# EAGLE board Board (EAGLE 9.5.1)
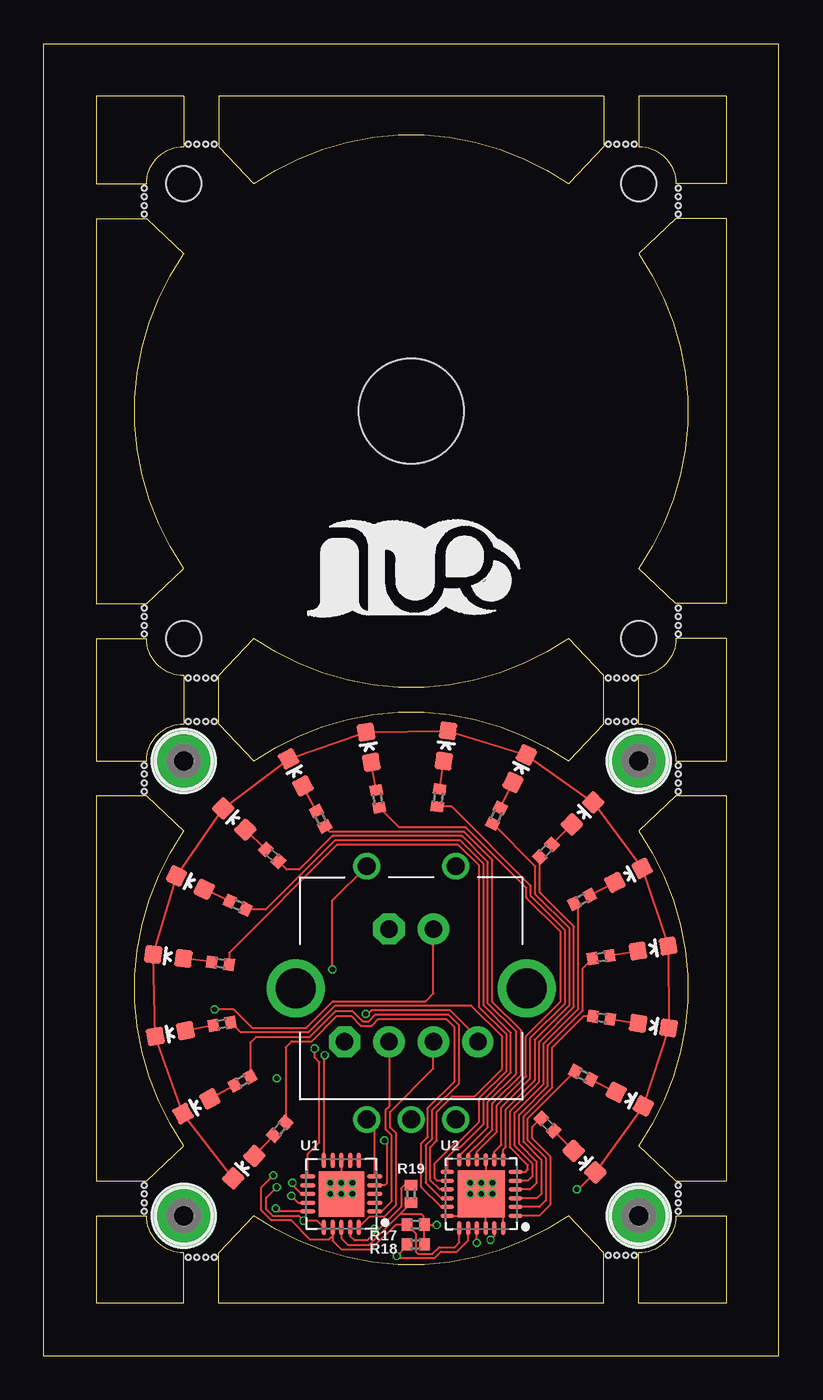
[diagram p0: board, top side]
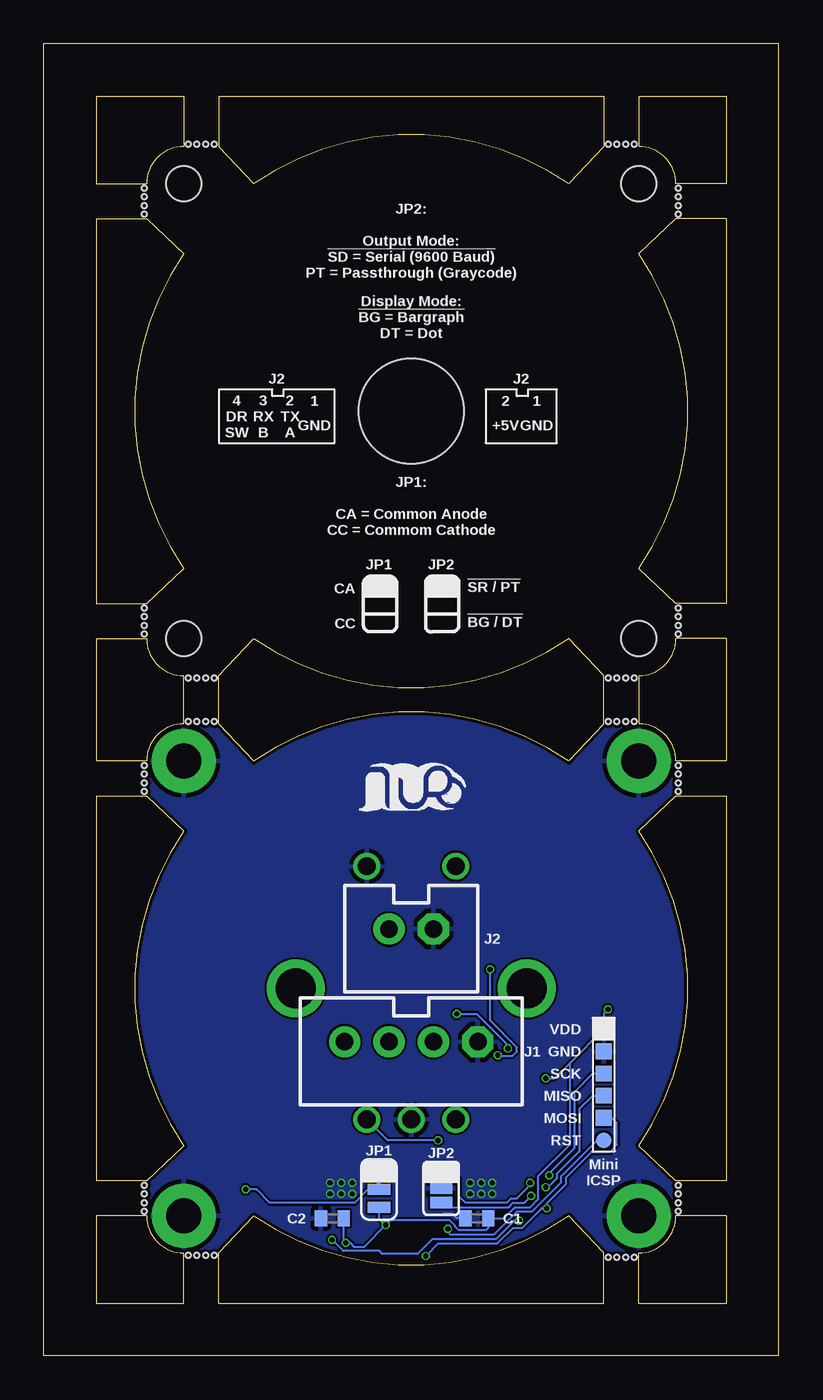
[diagram p1: board, bottom side, seen from below]

Size 42 x 75 mm. Coordinates in mm from the lower left corner, seen from the top.
Outline: 34,36.12 arc-90 36.12,34 39,34 39,41 36.12,41 arc-90 34,38.88 34,36.12
Outline: 32,36.12 30,34 arc69 12,34 10,36.12 10,38.88 12,41 arc69 30,41 32,38.88 32,36.12
Outline: 36.12,32 34,30 arc-69 34,12 36.12,10 39,10 39,32 36.12,32
Outline: 5.88,32 8,30 arc69 8,12 5.88,10 3,10 3,32 5.88,32
Outline: 10,5.88 12,8 arc69 30,8 32,5.88 32,3 10,3 10,5.88
Outline: 36.12,8 arc-90 34,5.88 34,3 39,3 39,8 36.12,8
Outline: 8,5.88 arc-90 5.88,8 3,8 3,3 8,3 8,5.88
Outline: 5.88,34 arc-90 8,36.12 8,38.88 arc-90 5.88,41 3,41 3,34 5.88,34
Outline: 34,69.12 arc-90 36.12,67 39,67 39,72 34,72 34,69.12
Outline: 32,69.12 30,67 arc69 12,67 10,69.12 10,72 32,72 32,69.12
Outline: 36.12,65 34,63 arc-69 34,45 36.12,43 39,43 39,65 36.12,65
Outline: 5.88,65 8,63 arc69 8,45 5.88,43 3,43 3,65 5.88,65
Outline: 5.88,67 arc-90 8,69.12 8,72 3,72 3,67 5.88,67
Outline: 0,0 0,75 42,75 42,0 0,0
Copper layers (1*16): Top 0.035mm / dielectric 1.5mm / Bottom 0.035mm
Design rules "JLCPCB-2Layer-Tented": minimum track width 5mil, minimum drill 0.3mm, track to track 5mil, track to pad 5mil, pad to pad 5mil, via to via 5mil, smd to smd 5mil, copper to edge 0.2mm, drill to drill 5mil, minimum pad ring 3mil, minimum via ring 3mil, stop-mask expansion 4mil, vias tented up to drill 50mil, thermal gap 10mil
Holes 0.3 mm at 9.25,38.75 9.75,38.75 9.25,36.25 9.75,36.25 32.25,36.25 32.75,36.25 32.75,38.75 32.25,38.75 36.25,32.25 36.25,33.25 36.25,9.25 36.25,9.75 32.75,5.75 32.25,5.75 9.75,5.62 9.25,5.62 5.75,9.25 5.75,9.75 5.75,32.25 5.75,32.75 5.75,42.25 5.75,42.75 36.25,42.25 36.25,42.75 36.25,65.25 36.25,65.75 32.75,69.25 32.25,69.25 9.25,69.25 9.75,69.25 5.75,65.75 5.75,65.25 5.75,33.25 5.75,33.75 8.75,36.25 8.25,36.25 8.75,38.75 8.25,38.75 5.75,41.75 5.75,41.25 5.75,66.25 5.75,66.75 8.75,69.25 8.25,69.25 33.25,69.25 33.75,69.25 36.25,66.25 36.25,66.75 36.25,41.75 36.25,41.25 36.25,32.75 36.25,33.75 36.25,8.75 36.25,8.25 33.25,5.75 33.75,5.75 8.75,5.62 8.25,5.62 5.75,8.75 5.75,8.25 33.25,36.25 33.75,36.25 33.25,38.75 33.75,38.75
Holes 6 mm at 21,54
Holes 2 mm at 8,67 34,67 34,41 8,41

## Footprints (pad centres in the part's own frame; a part is rotated, then mirrored left to right if it is on the bottom)
C0402 = smd 0.7 x 0.9: 1 -0.65,0; 2 0.65,0
2,0-PAD = drill 2 pad 3.642: B2,0 0,0
JST-4-PTH-VERT = drill 1 pad 1.778 octagon: 1 -3.81,-0.55 | drill 1 pad 1.778: 2 -1.27,-0.55; 3 1.27,-0.55; 4 3.81,-0.55
JST-2-PTH-VERT = drill 1 pad 1.778 octagon: 1 -1.27,-0.55 | drill 1 pad 1.778: 2 1.27,-0.55
MINI-ISP-LABELS = smd 0.9 x 0.9: GND 1.905,0; MISO -0.635,0; MOSI -1.905,0; RESET -3.175,0; SCK 0.635,0; VDD 3.175,0
SMT-JUMPER_3_1-NC_TRACE_SILK = smd 0.635 x 1.27: 1 -1.016,0; 2 0,0; 3 1.016,0
SMT-JUMPER_3_NO_SILK = smd 0.635 x 1.27: 1 -0.813,0; 2 0,0; 3 0.813,0
0603-BLUE = smd 1 x 1: A 0,-0.877; C 0,0.877
R0402 = smd 0.6 x 0.7: 1 -0.5,0; 2 0.5,0
ROTARY_ENC_PLAIN = drill 1.016: A 7.493,-2.54; B 7.493,2.54; C 7.493,0; SW+ -6.985,2.54; SW- -6.985,-2.54 | drill 2.286: P$3 0,6.604; P$4 0,-6.604
QFN50P400X400X80-21T260N = smd 0.887 x 0.264: 1 -1.912,1; 2 -1.912,0.5; 3 -1.912,0; 4 -1.912,-0.5; 5 -1.912,-1; 11 1.912,-1; 12 1.912,-0.5; 13 1.912,0; 14 1.912,0.5; 15 1.912,1 | smd 0.264 x 0.887: 6 -1,-1.912; 7 -0.5,-1.912; 8 0,-1.912; 9 0.5,-1.912; 10 1,-1.912; 16 1,1.912; 17 0.5,1.912; 18 0,1.912; 19 -0.5,1.912; 20 -1,1.912 | smd 2.6 x 2.6: 21 0,0
QFN50P400X400X80-25T270N = smd 0.81 x 0.27: 1 -1.945,1.25; 2 -1.945,0.75; 3 -1.945,0.25; 4 -1.945,-0.25; 5 -1.945,-0.75; 6 -1.945,-1.25; 13 1.945,-1.25; 14 1.945,-0.75; 15 1.945,-0.25; 16 1.945,0.25; 17 1.945,0.75; 18 1.945,1.25 | smd 0.27 x 0.81: 7 -1.25,-1.945; 8 -0.75,-1.945; 9 -0.25,-1.945; 10 0.25,-1.945; 11 0.75,-1.945; 12 1.25,-1.945; 19 1.25,1.945; 20 0.75,1.945; 21 0.25,1.945; 22 -0.25,1.945; 23 -0.75,1.945; 24 -1.25,1.945 | smd 2.7 x 2.7: 25 0,0

## Placement (x,y rotation side)
C1  100n  [C0402]  17.26,7.86 180 bottom
C2  100n  [C0402]  25.51,7.86 180 bottom
H1  2mm  [2,0-PAD]  8,8 0 top
H2  2mm  [2,0-PAD]  8,34 0 top
H3  2mm  [2,0-PAD]  34,34 0 top
H4  2mm  [2,0-PAD]  34,8 0 top
J1  OUT  [JST-4-PTH-VERT]  21,17.39 180 bottom
J2  POWER  [JST-2-PTH-VERT]  21,23.85 180 bottom
J3  ICSP  [MINI-ISP-LABELS]  10,15.5 90 bottom
JP1  JUMPER-SMT_3_1-NC_TRACE_SILK  [SMT-JUMPER_3_1-NC_TRACE_SILK]  22.84,9.51 90 bottom
JP2  MODE  [SMT-JUMPER_3_NO_SILK]  19.29,9.57 90 bottom
LED1  [0603-BLUE]  11.43,10.78 136.8 top
LED2  [0603-BLUE]  8.73,14.27 118.7 top
LED3  [0603-BLUE]  7.24,18.42 100.6 top
LED4  [0603-BLUE]  7.12,22.83 82.5 top
LED5  [0603-BLUE]  8.38,27.05 64.3 top
LED6  [0603-BLUE]  10.89,30.68 46.2 top
LED7  [0603-BLUE]  14.4,33.35 28.1 top
LED8  [0603-BLUE]  18.57,34.79 10 top
LED9  [0603-BLUE]  22.98,34.86 351.9 top
LED10  [0603-BLUE]  27.19,33.56 333.7 top
LED11  [0603-BLUE]  30.79,31.01 315.6 top
LED12  [0603-BLUE]  33.42,27.46 297.5 top
LED13  [0603-BLUE]  34.81,23.28 279.4 top
LED14  [0603-BLUE]  34.84,18.87 261.2 top
LED15  [0603-BLUE]  33.49,14.67 243.1 top
LED16  [0603-BLUE]  30.9,11.1 225 top
R1  100  [R0402]  13.48,12.97 226.8 top
R2  100  [R0402]  11.36,15.71 208.7 top
R3  100  [R0402]  10.19,18.97 190.6 top
R4  100  [R0402]  10.09,22.44 172.5 top
R5  100  [R0402]  11.08,25.76 154.3 top
R6  100  [R0402]  13.05,28.61 136.2 top
R7  100  [R0402]  15.81,30.7 118.1 top
R8  100  [R0402]  19.09,31.83 100 top
R9  100  [R0402]  22.55,31.89 81.9 top
R10  100  [R0402]  25.87,30.87 63.7 top
R11  100  [R0402]  28.69,28.86 45.6 top
R12  100  [R0402]  30.76,26.08 27.5 top
R13  100  [R0402]  31.85,22.79 9.4 top
R14  100  [R0402]  31.87,19.33 351.2 top
R15  100  [R0402]  30.81,16.03 333.1 top
R16  100  [R0402]  28.78,13.22 315 top
R17  4k7  [R0402]  21.25,7.5 0 top
R18  4k7  [R0402]  21.25,6.38 0 top
R19  4k7  [R0402]  20.99,9.26 270 top
SW1  [ROTARY_ENC_PLAIN]  21,21 270 top
U1  ATTINY2313A  [QFN50P400X400X80-21T260N]  17,9.26 180 top
U2  AW9523B  [QFN50P400X400X80-25T270N]  25,9.26 180 top
U$1  [LOGO-SILKSCREEN]  21,44 0 top
U$2  [LOGO-SILKSCREEEN-S]  21,32 0 bottom

## Library data of the parts
C1 C2 = rcl; LCSC: C1525; SPICEPREFIX: C
H1-H4 = Parts
J1 J2 = Class D Amp
J3 = MiniISP
JP1 JP2 = SparkFun-Jumpers
LED1-LED16 = BeagleBone_Blue_R3; LCSC: C2290
R1-R16 = rcl; LCSC: C25076; SPICEPREFIX: R
R17-R19 = rcl; LCSC: C25900; SPICEPREFIX: R
SW1 = SparkFun-Electromechanical
U1 = Parts; LCSC: C185530
U2 = Parts; LCSC: C148077
U$1 U$2 = OwnStuff

## Nets
+5V: C1.1 C2.1 J2.2 J3.VDD JP1.1 R17.2 R18.2 R19.2 U1.18 U2.21
GND: C1.2 C2.2 H1.B2,0 H2.B2,0 H3.B2,0 H4.B2,0 J1.1 J2.1 J3.GND JP1.3 JP2.2 SW1.C SW1.SW+ U1.8 U1.21 U2.9 U2.18 U2.22 U2.24 U2.25
N$1: J3.RESET R19.1 U1.19
N$2: LED12.A R12.2
N$3: LED11.A R11.2
N$4: LED10.A R10.2
N$5: LED9.A R9.2
N$6: LED8.A R8.2
N$7: LED7.A R7.2
N$8: LED6.A R6.2
N$9: LED5.A R5.2
N$10: LED16.A R16.2
N$11: LED15.A R15.2
N$12: LED14.A R14.2
N$13: LED13.A R13.2
N$14: LED4.A R4.2
N$15: LED3.A R3.2
N$16: LED2.A R2.2
N$17: LED1.A R1.2
N$18: J3.SCK R17.1 U1.17 U2.19
N$19: J3.MISO U1.16 U2.23
N$20: J1.3 U1.20
N$21: R12.1 U2.5
N$22: R11.1 U2.6
N$23: R10.1 U2.7
N$24: R9.1 U2.8
N$25: R8.1 U2.10
N$26: R7.1 U2.11
N$27: R6.1 U2.12
N$28: R5.1 U2.13
N$29: R16.1 U2.1
N$30: R15.1 U2.2
N$31: R14.1 U2.3
N$32: R13.1 U2.4
N$33: R4.1 U2.14
N$34: R3.1 U2.15
N$35: R2.1 U2.16
N$36: R1.1 U2.17
N$37: SW1.A U1.5
N$38: SW1.SW- U1.10
N$39: J1.2 U1.1
N$40: SW1.B U1.4
N$41: J3.MOSI R18.1 U1.15 U2.20
N$42: J1.4 U1.11
N$43: JP2.3 U1.13
N$44: JP2.1 U1.14
N$45: JP1.2 LED1.C LED2.C LED3.C LED4.C LED5.C LED6.C LED7.C LED8.C LED9.C LED10.C LED11.C LED12.C LED13.C LED14.C LED15.C LED16.C

## Tracks (layer width: path | path; a pad name or v marks a point on that pad's centre or on a via)
+5V  (via drill 0.3)
  Top 0.127: U1.18 17,6.71 17.38,6.33 18.59,6.33 20.37,8.11 | 20.37,8.11 21.57,8.11 21.7,7.99 21.7,7.55 R17.2 | v24.75,6.46 U2.21 | R17.2 22.44,7.5 v22.46,7.48 | v9.76,19.8 v9.77,19.79 10.87,19.79 11.92,18.74 15,18.74 16.53,20.26 21.82,20.26 22.27,20.71 J2.2 | R19.2 20.99,8.73 20.37,8.11 | R18.2 R17.2
  Bottom 0.127: v22.46,7.48 22.47,7.47 22.84,7.84 JP1.1 | C2.1 24.86,6.57 v24.75,6.46 24.5,6.46 24.28,6.24 23.7,6.24 v22.46,7.48 | 11.92,16.75 J3.VDD 10,19.56 v9.76,19.8 | 11.92,16.75 11.92,12.09 13.74,10.28 13.74,8.96 14.21,8.49 15.08,8.49 15.72,7.86 C1.1 16.61,7.32 16.75,7.18 18.3,7.18 18.49,7.37 18.49,7.43 18.79,7.73 22.21,7.73 v22.46,7.48 | v13.32,15.86 12.82,15.86 11.92,16.75
GND  (via drill 0.3)
  Top 0.127: U1.8 U1.21 17.51,8.62 17.51,8.87 17.89,9.26 | 25.26,9 25.26,8.62 25.25,8.62 U2.22 | 25.26,9 U2.25 | U2.9 25.25,10.14 v25,9.89 U2.25 | U2.24 26.25,8 25.26,9 | U2.18 23.75,8 U2.25
  Bottom 0.127: C1.2 18.4,7.86 18.65,8.11 19.16,8.11
  other vias: 17,9.26 16.37,9.26 17.64,9.26 25,9.26 24.37,9.26 25.64,9.26 25.64,9.89 24.37,9.89 16.37,9.89 17.64,9.89 17,9.89
  pour Bottom: 4.81,4.81 4.81,36.56 4.81,37.83 36.56,37.83 37.83,37.83 37.83,4.81
N$1  (via drill 0.3)
  Top 0.127: U1.19 17.51,7.33 17.51,6.84 17.76,6.59 18.49,6.59 19.02,7.12 | 19.02,7.12 20.43,8.52 20.43,9.57 20.61,9.76 R19.1 | 19.02,7.12 19.02,7.15 v18.91,7.26
  Bottom 0.127: J3.RESET 10.38,12.32 12.44,10.27 12.44,9.9 14.1,8.24 14.97,8.24 16.28,6.92 18.74,6.92 18.91,7.1 v18.91,7.26
N$2
  Top 0.127: R12.2 LED12.A
N$3
  Top 0.127: R11.2 LED11.A
N$4
  Top 0.127: R10.2 LED10.A
N$5
  Top 0.127: R9.2 LED9.A
N$6
  Top 0.127: R8.2 LED8.A
N$7
  Top 0.127: R7.2 LED7.A
N$8
  Top 0.127: R6.2 LED6.A
N$9
  Top 0.127: R5.2 LED5.A
N$10
  Top 0.127: R16.2 LED16.A
N$11
  Top 0.127: R15.2 LED15.A
N$12
  Top 0.127: R14.2 LED14.A
N$13
  Top 0.127: R13.2 LED13.A
N$14
  Top 0.127: R4.2 LED4.A
N$15
  Top 0.127: R3.2 LED3.A
N$16
  Top 0.127: R2.2 LED2.A
N$17
  Top 0.127: R1.2 LED1.A
N$18  (via drill 0.3)
  Top 0.127: U1.17 16.5,6.84 | 16.5,6.84 16.5,6.58 17,6.08 18.7,6.08 20.12,7.5 R17.1 21.26,6.99 21.26,5.95 21.38,5.83 22.21,5.83 22.59,6.21 23.48,6.21 23.75,6.48 U2.19 | 16.5,6.84 16.3,6.64 15.24,6.64 14.15,7.73 13,7.73 12.43,8.3 12.43,9.64 v13.11,10.31
  Bottom 0.127: v13.11,10.31 13.11,10.44 11.67,11.88 11.67,15.1 10.63,16.13 J3.SCK
N$19  (via drill 0.3)
  Top 0.127: U2.23 25.75,6.85 v25.53,6.62 | U1.16 15.62,7.72 v14.84,7.72 14.57,8 13.1,8 12.71,8.38 12.71,9.03 v13.32,9.64
  Bottom 0.127: J3.MISO 10.63,14.87 11.4,14.1 11.4,11.69 12.69,10.39 12.69,10.14 13.2,9.64 v13.32,9.64 | v25.53,6.62 24.89,5.99 22.81,5.99 22.65,5.83 20.64,5.83 19.8,6.67 16.18,6.67 15.13,7.72 v14.84,7.72
N$20
  Top 0.127: J1.3 22.27,16.42 19.8,13.95 19.8,13.04 20.14,12.7 20.14,8.62 19.45,7.93 18.59,7.93 U1.20
N$21
  Top 0.127: R12.1 30.55,25.61 30.55,19.84 28.56,17.85 28.56,15.54 26.91,13.89 26.91,12.01 27.92,10.99 27.92,10.27 27.66,10.01 U2.5
N$22
  Top 0.127: U2.6 27.54,10.53 27.67,10.65 27.67,10.89 26.65,11.9 26.65,13.99 28.3,15.64 28.3,17.95 30.3,19.95 30.3,24.53 28.34,26.49 R11.1
N$23
  Top 0.127: U2.7 26.25,11.79 26.4,11.94 26.4,14.1 28.05,15.75 28.05,18.06 30.04,20.05 30.04,24.43 28.09,26.38 28.09,27.97 R10.1
N$24
  Top 0.127: U2.8 25.75,11.65 26.15,12.05 26.15,14.2 27.8,15.86 27.8,18.16 29.79,20.16 29.79,24.32 27.84,26.28 27.84,26.87 23.31,31.39 R9.1
N$25
  Top 0.127: U2.10 24.75,11.67 25.89,12.81 25.89,14.31 27.54,15.96 27.54,18.27 29.54,20.26 29.54,24.22 27.58,26.17 27.58,26.75 24.12,30.21 20.31,30.21 R8.1
N$26
  Top 0.127: R7.1 16.35,29.96 24.01,29.96 25.64,28.33 25.64,20.24 27.29,18.59 27.29,16.07 25.64,14.41 25.64,12.92 24.65,11.93 24.62,11.93 24.25,11.55 U2.11
N$27
  Top 0.127: R6.1 13.88,27.8 14.59,27.8 16.49,29.7 23.91,29.7 25.38,28.23 25.38,20.14 26.99,18.54 26.99,16.12 25.38,14.52 25.38,13.06 23.75,11.43 U2.12
N$28
  Top 0.127: U2.13 23.05,10.52 23.05,11.34 23.63,11.93 23.8,11.93 25.13,13.25 25.13,14.62 26.7,16.2 26.7,18.46 25.13,20.03 25.13,28.12 23.8,29.45 16.62,29.45 12.68,25.51 11.56,25.51 R5.1
N$29
  Top 0.127: R16.1 27.92,13.07 27.92,12.43 28.94,11.41 28.94,8.62 28.32,8 U2.1
N$30
  Top 0.127: R15.1 30.35,16.25 27.67,13.57 27.67,12.32 28.69,11.31 28.69,8.87 28.32,8.5 U2.2
N$31
  Top 0.127: R14.1 31.37,19.41 30.84,19.41 29.07,17.64 29.07,15.33 27.42,13.68 27.42,12.22 28.43,11.2 28.43,9.26 28.18,9.01 U2.3
N$32
  Top 0.127: U2.4 27.79,9.51 28.18,9.89 28.18,11.1 27.16,12.11 27.16,13.78 28.81,15.43 28.81,17.74 30.81,19.73 30.81,22.16 R13.1
N$33
  Top 0.127: U2.14 22.48,10.01 22.34,10.14 22.34,10.99 23.52,12.18 23.7,12.18 24.88,13.36 24.88,14.73 26.45,16.3 26.45,18.36 24.88,19.93 24.88,28.02 23.7,29.19 16.75,29.19 10.59,23.04 R4.1
N$34
  Top 0.127: U2.15 22.62,9.51 22.08,10.04 22.08,11.92 22.46,12.3 22.46,13.95 23.34,14.83 24.62,14.83 26.19,16.41 26.19,18.25 24.43,20.01 16.63,20.01 15.11,18.48 11.26,18.48 R3.1
N$35
  Top 0.127: U2.16 22.71,9.01 21.83,9.89 21.83,12.03 22.21,12.41 22.21,14.06 23.73,15.58 23.73,18.89 23.11,19.5 18.95,19.5 18.57,19.12 18.23,19.12 17.63,19.72 16.7,19.72 15.21,18.23 12.13,18.23 11.79,17.89 R2.1
N$36
  Top 0.127: U2.17 22.7,8.5 21.57,9.64 21.57,12.13 21.95,12.51 21.95,14.16 23.48,15.69 23.48,18.78 23.01,19.25 19.12,19.25 18.74,18.86 18.12,18.86 17.57,19.41 16.76,19.41 15.32,17.98 14.17,17.98 13.82,17.63 R1.1
N$37
  Top 0.127: U1.5 18.91,13.05 SW1.A
N$38  (via drill 0.3)
  Top 0.127: v16.49,22.08 16.49,26.02 SW1.SW- | v16.06,17.18 16,17.12 U1.10
  Bottom 0.127: v16.06,17.18 16.01,17.13 15.22,17.13 14.97,17.38 14.97,17.64 15.3,17.98 15.31,17.98 16.18,18.84 16.49,19.16 v16.49,22.08
N$39
  Top 0.127: U1.1 19.3,8.25 19.88,8.83 19.88,12.6 19.54,12.94 19.54,14.05 19.73,14.24 J1.2
N$40  (via drill 0.3)
  Top 0.127: U1.4 18.92,9.76 19.5,9.76 19.63,9.89 19.63,12.14 v19.46,12.3
  Bottom 0.127: v19.46,12.3 22.34,12.3 SW1.B
N$41  (via drill 0.3)
  Top 0.127: U2.20 24.25,6.6 23.61,5.95 22.7,5.95 22.31,5.57 20.3,5.57 v20.18,5.7 20.75,6.28 R18.1 | U1.15 13.43,8.25 v13.26,8.43
  Bottom 0.127: J3.MOSI 9.53,13.6 9.26,13.32 9.26,12.05 9.64,11.67 10.68,11.67 12.18,10.17 12.18,9.8 13.26,8.73 v13.26,8.43 13.55,8.43 14.67,7.31 15.18,7.31 16.07,6.42 19.46,6.42 v20.18,5.7
N$42  (via drill 0.3)
  Top 0.127: J1.4 24.81,18.16 23.22,19.75 18.74,19.75 18.53,19.54 v18.4,19.54 | U1.11 15.09,11.53 15.75,12.19 15.75,16.78 15.48,17.05 v15.48,17.56
  Bottom 0.127: v18.4,19.54 17.26,19.54 15.48,17.76 v15.48,17.56
N$43  (via drill 0.3)
  Top 0.127: v14.21,9.89 14.21,9.76 14.72,9.26 U1.13
  Bottom 0.127: v14.21,9.89 14.21,9.76 14.97,9 15.29,9 15.54,8.75 17.9,8.75 18.27,9.13 18.27,10.14 18.51,10.38 JP2.3
N$44  (via drill 0.3)
  Top 0.127: U1.14 14.54,8.75 v14.15,9.14
  Bottom 0.127: v14.15,9.14 14.53,8.75 15.19,8.75 15.44,8.5 19.03,8.5 JP2.1
N$45  (via drill 0.3)
  Top 0.127: LED1.C LED2.C LED3.C LED4.C LED5.C LED6.C LED7.C LED8.C LED9.C LED10.C LED11.C LED12.C LED13.C LED14.C LED15.C LED16.C 30.55,9.51 v30.46,9.51
  Bottom 0.127: v30.46,9.51 29.83,9.51 29.07,8.75 24.23,8.75 23.48,9.51 JP1.2

## Text on the board
bNames: JP2: / / Output Mode: / !SD = Serial (9600 Baud) / PT = Passthrough (Graycode) | Display Mode: / !BG = Bargraph / DT = Dot | J2 | J2 | 1 | 2 | 1 | 2 / TX / A | 3 / RX / B | 4 / DR / SW | GND | +5V | GND | JP1: / / CA = Common Anode / CC = Commom Cathode | JP2 | JP1 | !SR / PT | CA | !BG / DT | CC | Mini / ICSP